# Altium PCB Final_PCB.PcbDoc
Units mm, origin at the board's own origin, x right, y up, seen from the top; angles counter-clockwise.
Board outline 97 x 100 mm, 2 copper layers (Top Layer, Bottom Layer); 57 components, 39 nets, 188 pads, 18 vias.
Unrouted connection lines stored in the file: 6.
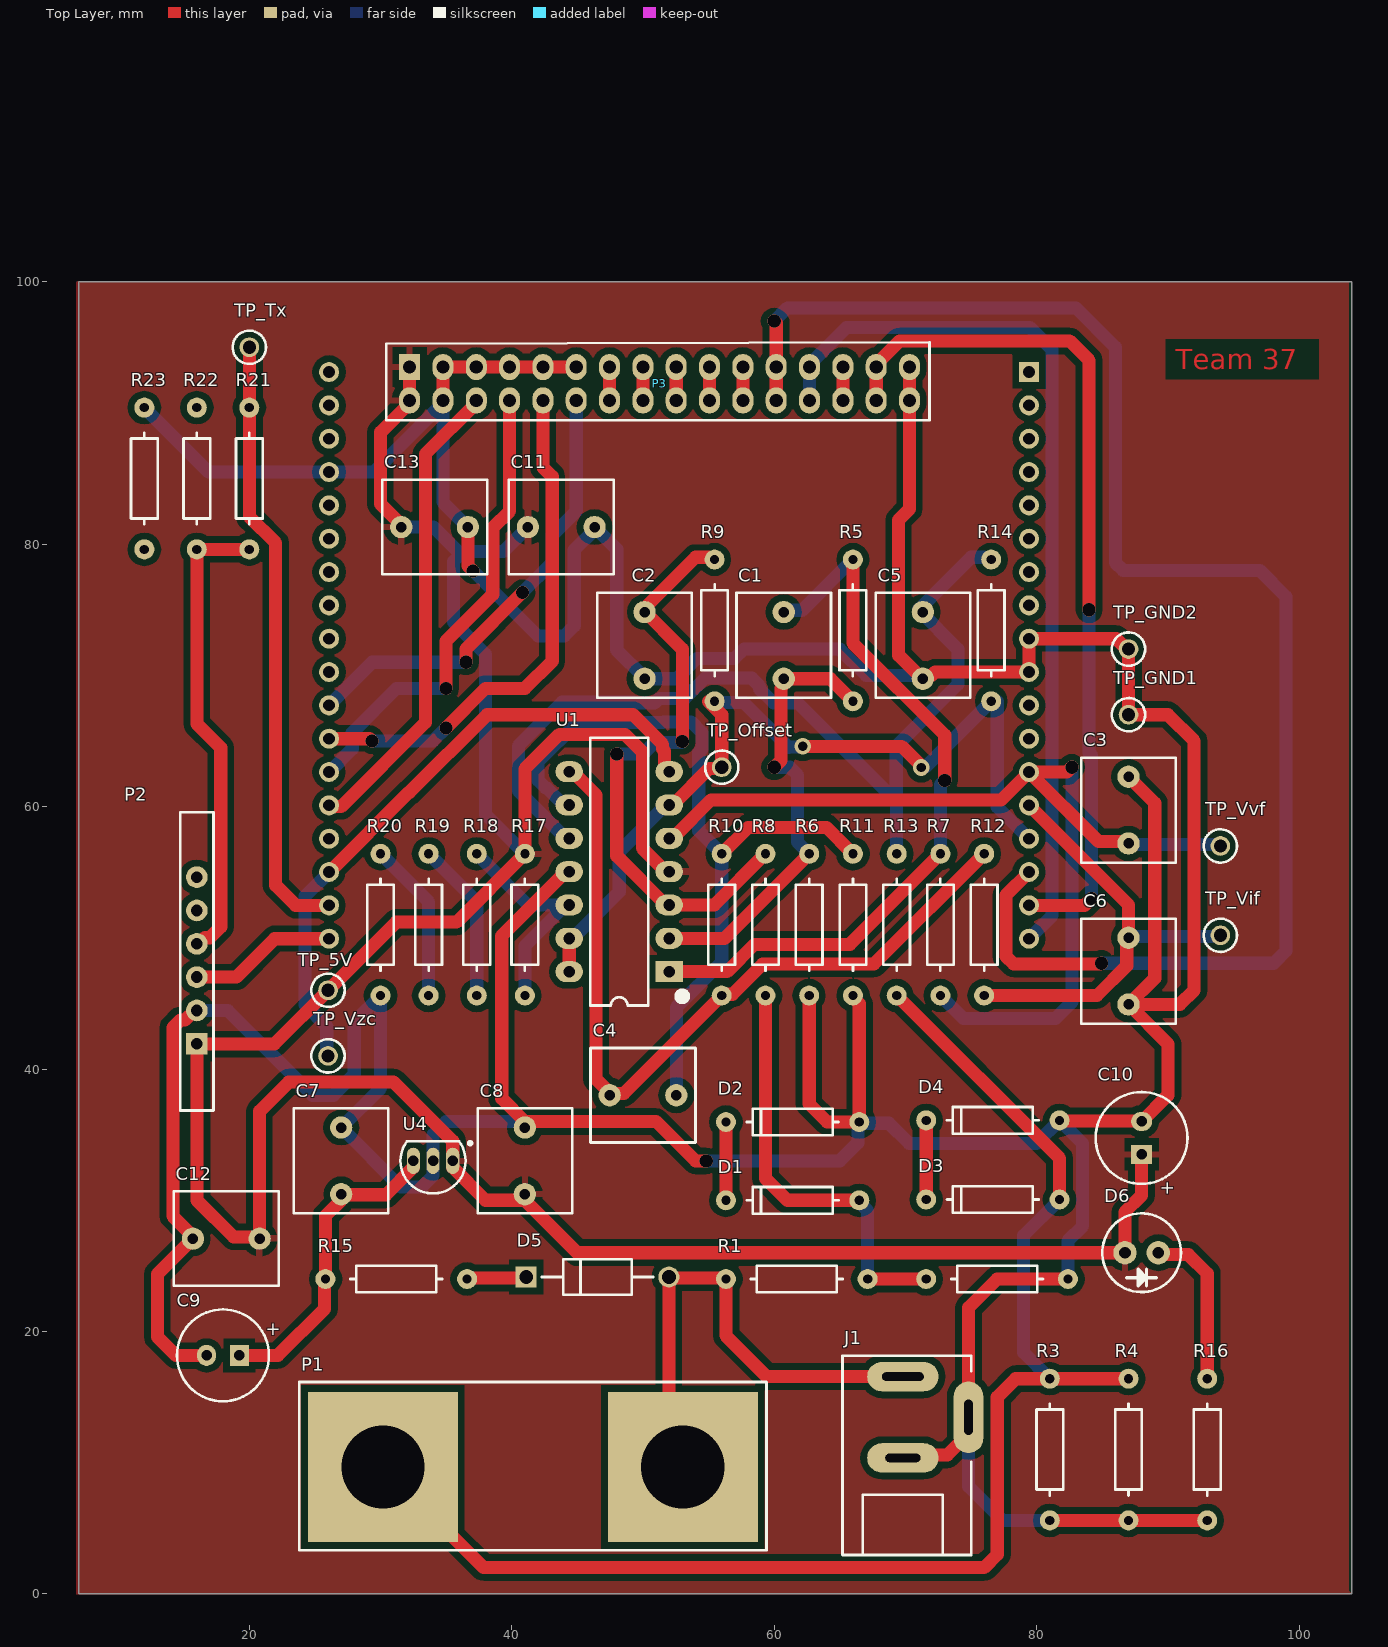
[diagram p0: Top Layer view]
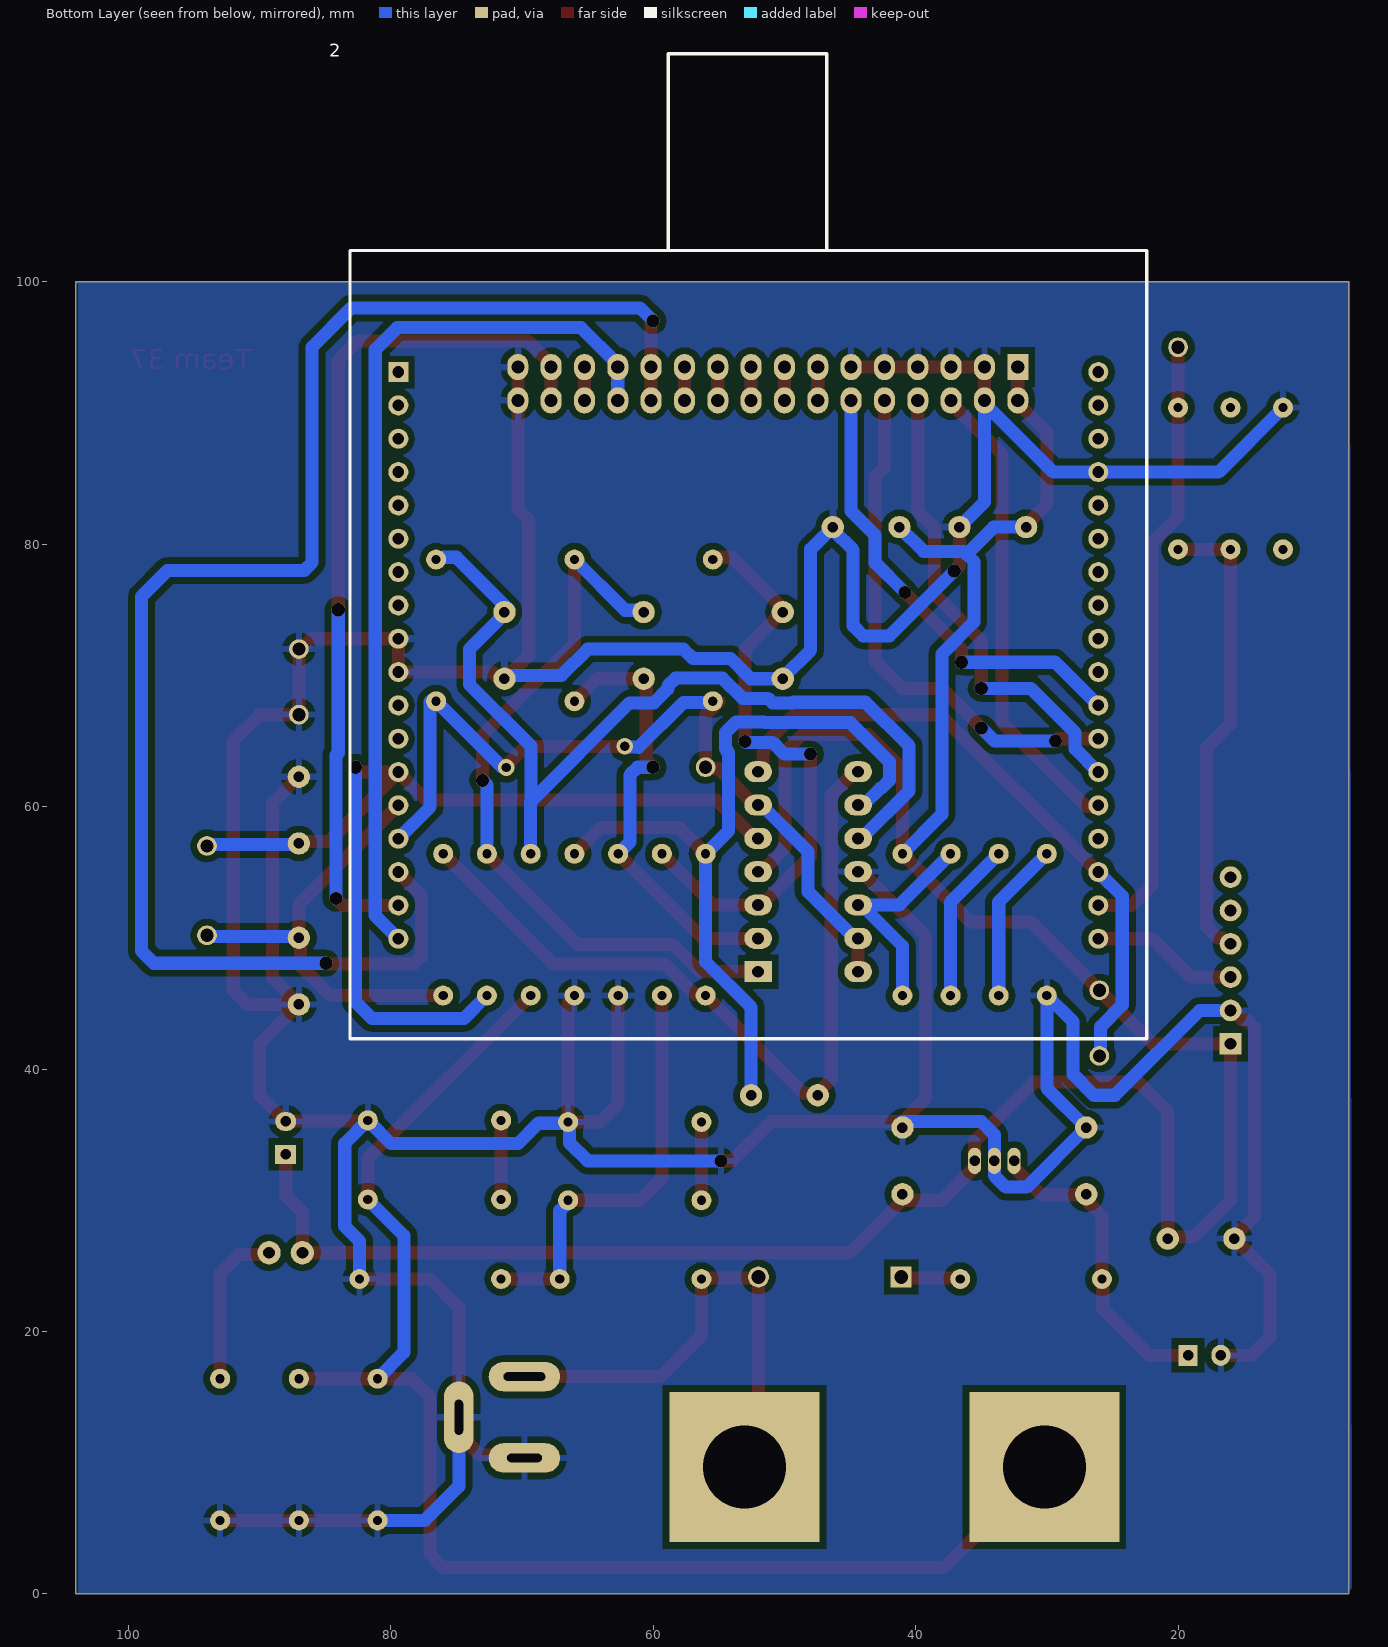
[diagram p1: Bottom Layer view, seen from below]

## Layer stack, top to bottom
Top Solder: solder mask 0.0102, Solder Resist, Dk 3.5
Top Layer: signal copper 0.0356
Dielectric 1: dielectric 0.32, FR-4, Dk 4.8
Bottom Layer: signal copper 0.0356
Bottom Solder: solder mask 0.0102, Solder Resist, Dk 3.5

## Board outline
7,0 104,0 104,100 7,100

## Design rules (kind name [scope] priority, off if disabled: settings)
Clearance [All] p1: gap=0.5 ignorepadtopadclearanceinfootprint=FALSE
Height [All] p1: minheight=0 maxheight=100 prefheight=12.7
HoleSize [All] p1: absolutevalues=TRUE maxlimit=10 minlimit=0.5 maxpercent=80.000 minpercent=20.000
PolygonConnect [All] p1: connectstyle=Relief reliefconductorwidth=0.5 reliefentries=4 polygonreliefangle="90 Angle" airgapwidth=0.5
RoomDefinition Final_Schematic [InComponentClass('Final_Schematic')] p1: confinementstyle=ConfineIn formatcopy=TRUE lockcomponents=FALSE outline -35,-25 15.8,-25 15.8,0.4 -35,0.4
RoutingVias [All] p1: holewidth=0.711 width=1.27 viastyle="Through Hole" minholewidth=0.711 minwidth=1.27 maxholewidth=0.711 maxwidth=1.27
SilkToSilkClearance [All] p1: silktosilkclearance=0.1
SilkToSolderMaskClearance [IsPad] p1: minsilkscreentomaskgap=0.1 clearancetoexposedcopper=TRUE
SolderMaskExpansion [All] p1: expansion=0.102 istentingtop=FALSE
Width [All] p1: maxlimit=10 minlimit=0.5 preferedwidth=1
26 further rules are at their usual default settings.

## Classes and differential pairs
component class Final_Schematic: C1 C2 C3 C4 C5 C6 C7 C8 C9 C10 C11 C12 C13 D1 D2 D3 D4 D5 D6 J1 P1 P2 P3 R1 R3 R4 R5 R6 R7 R8 R9 R10 R11 R12 R13 R14 R15 R16 R17 R18 R19 R20 R21 R22 R23 TP_5V TP_GND1 TP_GND2 TP_Offset TP_Tx TP_Vif TP_Vvf TP_Vzc U4

## Components (designator, comment, footprint, x,y, rotation, side; value= is the part's Value field where it differs from the comment)
2 "ATmega328PB Xplained Mini Header" "ATmeg328P Xplained" 52.748,71.52 r180 bottom (schematic designator U6)
C1 "100n0" "FILM CAP-0.2" 60.725,72.282 r270 top
C2 "100n0" "FILM CAP-0.2" 50.121,72.282 r270 top
C3 "3n3" "FILM CAP-0.2" 87,59.73 r90 top
C4 "100n0" "FILM CAP-0.2" 50,38 r0 top
C5 "100n0" "FILM CAP-0.2" 71.33,72.282 r270 top
C6 "3n3" "FILM CAP-0.2" 87,47.46 r270 top
C7 "100n0" "FILM CAP-0.2" 27,33 r90 top
C8 "100n0" "FILM CAP-0.2" 41,33 r90 top
C9 "47n0" "CAP-RAD-2.5mm Pitch" 17.99,18.18 r180 top
C10 "22n0" "CAP-RAD-2.5mm Pitch" 88,34.75 r90 top
C11 "100n0" "FILM CAP-0.2" 43.771,81.299 r0 top
C12 "100n0" "FILM CAP-0.2" 18.244,27.07 r180 top
C13 "100n0" "FILM CAP-0.2" 34.119,81.299 r0 top
D1 "BZX79-CXVX" AXIAL-Zener-0.4 61.402,29.992 r180 top
D2 "BZX79-CXVX" AXIAL-Zener-0.4 61.402,35.96 r180 top
D3 "BZX79-CXVX" AXIAL-Zener-0.4 76.664,30.056 r180 top
D4 "BZX79-CXVX" AXIAL-Zener-0.4 76.664,36.087 r180 top
D5 "1N4007" 1N4007-MFG 46.534,24.149 r0 top
D6 "Green" LED 88,26 r0 top
J1 "DC barrel jack" AC-Socket 69.806,10.56 r90 top value=socket
P1 "Dual Banana Plugs" "Dual Banana Plug" 41.612,9.671 r180 top
P2 "BLE Module Header" HM10_HDR1X6 16,41.92 r90 top
P3 "Display" Display 49.994,92.221 r180 top
R1 "82k" AXIAL-0.4 61.722,23.997 r180 top value=820k
R2 "3k9" AXIAL-0.4 76.984,23.997 r180 top value=39k
R3 "1R" AXIAL-0.4 81,11 r90 top
R4 "1R2" AXIAL-0.4 87,11 r90 top
R5 "22k0" AXIAL-0.4 65.996,73.425 r270 top value=56k0
R6 "22k0" AXIAL-0.4 62.667,51 r90 top value=56k0
R7 "4k7" AXIAL-0.4 72.667,51 r90 top
R8 "18k0" AXIAL-0.4 59.333,51 r90 top
R9 "22k0" AXIAL-0.4 55.455,73.425 r90 top value=56k0
R10 "8k2" AXIAL-0.4 56,51 r90 top
R11 "3k9" AXIAL-0.4 66,51 r90 top
R12 "4k7" AXIAL-0.4 76,51 r90 top
R13 "3k9" AXIAL-0.4 69.333,51 r90 top
R14 "8k2" AXIAL-0.4 76.537,73.425 r90 top
R15 "33" AXIAL-0.4 31.198,23.997 r180 top
R16 "270" AXIAL-0.4 93,11 r90 top
R17 "39k0" AXIAL-0.4 41,51 r90 top
R18 "27k0" AXIAL-0.4 37.333,51 r90 top
R19 "1k2" AXIAL-0.4 33.667,51 r90 top
R20 "39R0" AXIAL-0.4 30,51 r90 top
R21 "4k7" AXIAL-0.4 20,85 r270 top
R22 "820R0" AXIAL-0.4 16,85 r270 top
R23 "10k0" AXIAL-0.4 12,85 r270 top
TP_5V "5003" TP_TH 26,46 r90 top
TP_GND1 "5003" TP_TH 87,67 r90 top
TP_GND2 "5003" TP_TH 87,72 r90 top
TP_Offset "5003" TP_TH 56,63 r90 top
TP_Tx "5003" TP_TH 20,95 r90 top
TP_Vif "5003" TP_TH 94,50.19 r90 top
TP_Vvf "5003" TP_TH 94,57 r90 top
TP_Vzc "5003" TP_TH 26,41 r90 top
U1 "LM324" DIP-14 48.19,55.036 r180 top
U4 "L78L05ACZ" TO-92 34,33 r90 top

## Footprints (in the part's own frame and the unit in brackets; to place one, negate y for a bottom-side part, rotate by r counter-clockwise, add the part's x,y. Pads: shape width x height; smd on the part's side, far side on the other; paste and mask are expansions set on the pad)
1N4007-MFG [mm]
  round 1.6 hole 1.05 paste-1000 mask+0: 1(5.438,0)
  rect 1.6x1.6 hole 1.05 paste-1000 mask+0: 2(-5.438,0)
  silkscreen extent -4.24,-1.35 4.24,1.35, body extent -6.34,-1.45 6.34,1.45, height 0.25
AC-Socket [mm]
  oval 2.25x5.45 hole 0.635 slot 3.175 at 90 deg: 1(6,0)
  oval 5.45x2.25 hole 0.635 slot 2.667 at 0 deg: 2(2.9,-5)
  oval 2.25x5.45 hole 0.635 slot 2.667 at 90 deg: 3(-0.2,0)
  silkscreen extent -7.6,-5.2 7.6,4.6, body extent -6.7,-5 6,4.2, height 10.5
"ATmeg328P Xplained" [mil]
  rect 60x60 hole 35: 1(-1050,850)
  round 60 hole 35: 2(-1050,750) 3(-1050,650) 4(-1050,550) 5(-1050,450) 6(-1050,350) 7(-1050,250) 8(-1050,150) 9(-1050,50) 10(-1050,-50) 11(-1050,-150) 12(-1050,-250) 13(-1050,-350) 14(-1050,-450) 15(-1050,-550) 16(-1050,-650) 17(-1050,-750) 18(-1050,-850) 19(1050,-850) 20(1050,-750) 21(1050,-650) 22(1050,-550) 23(1050,-450) 24(1050,-350) 25(1050,-250) 26(1050,-150) 27(1050,-50) 28(1050,50) 29(1050,150) 30(1050,250) 31(1050,350) 32(1050,450) 33(1050,550) 34(1050,650) 35(1050,750) 36(1050,850)
  silkscreen extent -1195,-1150 1195,1805, body extent -1201,-1150 1161,1845, height 452
AXIAL-0.4 [mm]
  round 1.524 hole 0.7: 1(-5.4,0) 2(5.4,0)
  silkscreen extent -3.5,-1.02 3.5,1.02, body extent -5.7,-1.3 5.7,1.3, height 2.7
AXIAL-Zener-0.4 [mil]
  round 60 hole 27.56: 1(-200,0) 2(200,0)
  silkscreen extent -138,-40 138,40, body extent -211,-52 211,52, height 92
"CAP-RAD-2.5mm Pitch" [mm] "Cap 6.3 X 11.2"
  rect 1.45x1.6 hole 0.8: 1(-1.25,0)
  oval 1.45x1.6 hole 0.8: 2(1.25,0)
  silkscreen extent -3.5,-3.5 3.5,3.5, body extent -3.15,-3.15 3.15,3.15, height 11.5
DIP-14 [mm] "DIP; 14 Leads; Row Spacing 7.62 mm; Pitch 2.54 mm"
  rect 2.1x1.6 hole 0.9: 1(-3.81,7.62)
  oval 2.1x1.6 hole 0.9: 2(-3.81,5.08) 3(-3.81,2.54) 4(-3.81,0) 5(-3.81,-2.54) 6(-3.81,-5.08) 7(-3.81,-7.62) 8(3.81,-7.62) 9(3.81,-5.08) 10(3.81,-2.54) 11(3.81,0) 12(3.81,2.54) 13(3.81,5.08) 14(3.81,7.62)
  silkscreen extent -5.1,-10.2 2.2,10.2, body extent -5.07,-10.2 5.09,10.12, height 9.47
Display [mm]
  rect 1.6x2 hole 1: 1(17.78,-1.27)
  oval 1.6x2 hole 1: 2(17.78,1.27) 3(15.24,-1.27) 4(15.24,1.27) 5(12.7,-1.27) 6(12.7,1.27) 7(10.16,-1.27) 8(10.16,1.27) 9(7.62,-1.27) 10(7.62,1.27) 11(5.08,-1.27) 12(5.08,1.27) 13(2.54,-1.27) 14(2.54,1.27) 15(0,-1.27) 16(0,1.27) 17(-2.54,-1.27) 18(-2.54,1.27) 19(-5.08,-1.27) 20(-5.08,1.27) 21(-7.62,-1.27) 22(-7.62,1.27) 23(-10.16,-1.27) 24(-10.16,1.27) 25(-12.7,-1.27) 26(-12.7,1.27) 27(-15.24,-1.27) 28(-15.24,1.27) 29(-17.78,-1.27) 30(-17.78,1.27) 31(-20.32,-1.27) 32(-20.32,1.27)
  silkscreen extent -21.84,-3.18 19.56,2.79, body extent -32.6,-50 26.4,4, height 13
"Dual Banana Plug" [mm] "Connector; 2 Position"
  rect 11.43x11.43 hole 6.35: 1(-11.43,0) 2(11.43,0)
  silkscreen extent -17.8,-6.48 17.8,6.35, body extent -17.38,-5.99 17.43,5.99, height 5.5
"FILM CAP-0.2" [mm]
  round 1.7 hole 0.8: 1(-2.54,0) 2(2.54,0)
  silkscreen extent -4,-3.6 4,3.6, body extent -3.6,-3.6 3.6,3.6, height 13.2
HM10_HDR1X6 [mil] "Connector; Header; 6 Position"
  rect 65x65 hole 35.43: 1(0,0)
  round 65 hole 35.43: 2(100,0) 3(200,0) 4(300,0) 5(400,0) 6(500,0)
  silkscreen extent -200,-50 695,50, body extent -142,-39 571,228, height 1843
LED [mil]
  round 70 hole 35.43: 1(-50,0) 2(50,0)
  silkscreen extent -118,-118 118,118, body extent -98,-98 98,98, height 413
TO-92 [mm] "TO, Flat Index; 3 In-Line, Axial Leads; Body Dia. 4.5mm; Leads 0.51 x 0.48 mm (max)"
  oval 2x1 hole 0.8: 1(0,-1.5) 2(0,0) 3(0,1.5)
  silkscreen extent -2.48,-2.96 1.5,2.48, body extent -2.4,-2.4 1.53,2.4, height 6.73
TP_TH [mm] "Test Point, Through Hole, Dia 2.54mm"
  round 1.5 hole 1: 1(0,0)
  silkscreen extent -1.27,-1.27 1.27,1.27, body extent -1.27,-1.27 1.27,1.27, height 4.57

## Part data
2: library part ATmega328PBXplained_TH, "Dual 18-pin headers connecting to ATmega328PB Xplained Mini", Manufacturer="Microchip Technology", Manufacturer Part Number=ATMEGA328PB-XMINI, Operating System=-, Supplier Part Number 1=ATMEGA328PB-XMINI-ND, Board Type="Evaluation Platform", Category="Development Boards, Kits, Programmers", ComponentLink1Description=http://www.microchip.com/mymicrochip/filehandler.aspx?ddocname=en589665, ComponentLink1URL=http://www.microchip.com/mymicrochip/filehandler.aspx?ddocname=en589665, Contents=Board(s), Core Processor=AVR, For Use With/Related Products=ATmega328P, Mounting Type=Fixed, Part Status=Active, Platform="ATmega328P Xplained Mini", Pricing 1="1=15.11 (NZD)", RoHS="RoHS Compliant", Stock 1=454, Supplier 1=Digi-Key, Type="MCU 8-Bit"
C1 C2 C3 C4 C5 C6 C7 C8 C11 C12 C13: library part FilmCap_TH_5P08, "Throughhole film capacitor with 5.08mm pitch"
C9 C10: library part ElecCap_TH_2P0, "Electrolytic capacitor with radial package, 2mm pitch and 5.2mm diameter", LatestRevisionDate=17-Jul-2002, LatestRevisionNote="Re-released for DXP Platform.", PackageDescription="Polarized Capacitor; 2 Leads", PackageReference=POLAR0.8, Published=8-Jun-2000, Publisher="Altium Limited"
D1 D2 D3 D4: library part Zener_TH_4AX0, "Axial zener diode BZX79 series", Manufacturer="Nexperia USA Inc.", Manufacturer Part Number=BZX79-C4V7,143, Operating Temperature="-65°C ~ 200°C", Package / Case="DO-204AH, DO-35, Axial", Supplier Device Package=DO-35, Supplier Part Number 1=1727-1864-1-ND, Tolerance=±5%, Category="Discrete Semiconductor Products", ComponentLink1Description=https://assets.nexperia.com/documents/data-sheet/BZX79.pdf, ComponentLink1URL=https://assets.nexperia.com/documents/data-sheet/BZX79.pdf, Mounting Type="Through Hole", Packaging="Cut Tape (CT)", Part Status=Active, Pricing 1="1=0.23, 10=0.206, 100=0.1123, 500=0.06912, 1000=0.04714 (NZD)", RoHS="RoHS Compliant", Stock 1=8933, Supplier 1=Digi-Key
D5: library part 1N4007_TH_4AX0, "1N4007 1000V standard axial diode", Supplier Part Number 1=1N4007RLGOSCT-ND, ComponentLink1Description=https://www.fairchildsemi.com/datasheets/1N/1N914.pdf, ComponentLink1URL=https://www.fairchildsemi.com/datasheets/1N/1N914.pdf, Supplier 1=Digi-Key
D6: library part LED_TH_2P54, "Typical throughole GaAs LED with 2.54mm pitch", Manufacturer="Generic Components", Class I=Optoelectronic, Class II=LED, Published=8-Jun-2000, Publisher="Altium Limited", Revision="July-2002: Re-released for DXP Platform."
J1: library part AC_Input, "DC barrel jack connection to AC source"
P1: library part AC_Output, "Dual banana plugs connection to the AC load", LatestRevisionDate=17-Jul-2002, LatestRevisionNote="Re-released for DXP Platform.", Publisher="Altium Limited"
P2: library part BLEModule_TH, "2.54mm pitch 6-pin header for BLE module", LatestRevisionDate=17-Jul-2002, LatestRevisionNote="Re-released for DXP Platform.", Publisher="Altium Limited"
P3: "16-Pin Header Connecting Display"
R1 R2 R3 R4 R5 R6 R7 R8 R9 R10 R11 R12 R13 R14 R15 R16 R17 R18 R19 R20 R21 R22 R23: library part Res_TH_0AX4, "Through hole resistor", ComponentLink1Description=http://www.royalohm.com/pdf/product2017/PrecisionMetalMF.pdf, LatestRevisionDate=17-Jul-2002, LatestRevisionNote="Re-released for DXP Platform.", PackageReference=AXIAL-0.4, Published=8-Jun-2000, Publisher="Altium Limited"
TP_5V TP_GND1 TP_GND2 TP_Offset TP_Tx TP_Vif TP_Vvf TP_Vzc: library part TestPoint, "Test Point, Orange, 1-Pin THD, RoHS", Forward Current="3 A", Forward Voltage="1.08 V", Max Operating Temperature="150 degC", Max Surge Current="80 A", Min Operating Temperature="-65 degC", Package Quantity=500, Peak Reverse Current="600 uA", ComponentLink1Description="Manufacturer URL", ComponentLink1URL=http://www.keyelco.com/, ComponentLink2Description=Datasheet, ComponentLink2URL=http://keyelco.com/userAssets/file/M65p56.pdf, DatasheetVersion=Jun-15, Diameter="5.3 mm", Height="0.25 inch", Length="9.5 mm", Mount="Through Hole", PackageDescription="1-Pin Through Hole Device, Dia 2.54 mm", PackageReference=5003, Packaging=Bulk, Pins=2, Radiation Hardening=No, REACH SVHC="No SVHC", RoHSCompliant=true, Weight="0.01 lb", Width="0.25 inch"
U1: library part LM324N_TH_DIP16, "IC OPAMP GP 14DIP", Current - Supply=1mA, Manufacturer="ON Semiconductor", Manufacturer Part Number=LM324N, Operating Temperature="0°C ~ 70°C", Package / Case="14-DIP (0.300\", 7.62mm)", Supplier Device Package=14-DIP, Supplier Part Number 1=LM324NFS-ND, Voltage - Supply, Single/Dual (±)="3 V ~ 32 V, ±1.5 V ~ 16 V", Amplifier Type="General Purpose", Base Part Number=LM324, Category="Integrated Circuits (ICs)", ComponentLink1Description=https://www.fairchildsemi.com/datasheets/LM/LM2902.pdf, ComponentLink1URL=https://www.fairchildsemi.com/datasheets/LM/LM2902.pdf, Mounting Type="Through Hole", Output Type=-, Packaging=Tube, Part Status=Active, Pricing 1="1=0.9, 10=0.775, 100=0.5789, 500=0.45482, 1000=0.35145 (NZD)", RoHS="RoHS Compliant", Slew Rate=-, Stock 1=2900, Supplier 1=Digi-Key
U4: library part L78L05_TH_TO92, "Voltage Regulator 5V", Base Part Number=LM78L05, Current - Output=100mA, Manufacturer="ON Semiconductor", Manufacturer Part Number=LM78L05ACZX, Operating Temperature="-40°C ~ 125°C", Package / Case="TO-226-3, TO-92-3 (TO-226AA) (Formed Leads)", Supplier Device Package=TO-92-3, Supplier Part Number 1=LM78L05ACZXCT-ND, Voltage - Input (Max)=30V, Voltage - Output (Max)=-, Voltage - Output (Min/Fixed)=5V, Category="Integrated Circuits (ICs)", ComponentLink1Description=https://www.fairchildsemi.com/datasheets/MC/MC78L05A.pdf, ComponentLink1URL=https://www.fairchildsemi.com/datasheets/MC/MC78L05A.pdf, Control Features=-, Mounting Type="Through Hole", Output Configuration=Positive, Output Type=Fixed, Packaging="Cut Tape (CT)", Part Status=Active, Pricing 1="1=0.69, 10=0.517, 100=0.3226, 500=0.2207, 1000=0.16976 (NZD)", Protection Features="Over Temperature, Short Circuit", PSRR="80dB (120Hz)", RoHS="RoHS Compliant", Stock 1=7782, Supplier 1=Digi-Key, Voltage Dropout (Max)=-

## Via types
v1: diameter 1, hole 1, Top Layer to Bottom Layer, 16 vias
v2: diameter 1.27, hole 0.711, Top Layer to Bottom Layer, 2 vias

## Nets (pads, with @x,y where several pads share a name; then routed paths per layer and width w, separated by ;. In a path a pad name is that pad's centre, name@x,y a point inside that pad or via, vN(x,y) a via of type N, cw(c..) or ccw(c..) an arc to the next point about the centre after c; other vN are vias at no path point)
5V: C8.1 C10.1 C11.1 C12.1 C13.1 D6.1 P2.1 P3.1 P3.2 P3.31 P3.32 R17.2 TP_5V.1 U1.4 U4.1 | length 217.7
  Top Layer w1: C13.1 31.579,81.464 30,83.043 30,88.537 32.214,90.751 P3.2 P3.1 ; U1.4 51.807,55.23 51.551,55.23 49.95,56.831 49.95,64.171 48.621,65.5 43.629,65.5 41,62.871 R17.2 35.798,51.198 31.198,51.198 TP_5V.1 21.92,41.92 P2.1 16,30 18.796,27.204 20.65,27.204 C12.1 20.784,36.784 23,39 31,39 35.5,34.5 U4.1 35.5,32.5 38,30 41,30 45,26 D6.1 86.73,29.108 88,30.378 C10.1
  Bottom Layer w1: C13.1 34.043,81.299 36.11,79.232 ; R17.2 38,59.4 38,71.621 35.551,74.07 35.551,78.672 36.328,79.449 39.381,79.449 C11.1
DS1: 2.23 P3.5 P3.6 | length 36.2
  Top Layer w1: 2.23 26.168,60 27,60 33.429,66.429 33.429,86.88 37.294,90.745 P3.6
DS2: 2.24 P3.7 P3.8 | length 36.2
  Top Layer w1: v1(35,69) 35,72.621 38.551,76.172 38.551,81.235 39.834,82.518 P3.8
  Bottom Layer w1: 2.24 27.84,64.392 27.84,65.621 31.218,69 v1(35,69)
DS3: 2.25 P3.9 P3.10 | length 39.8
  Top Layer w1: 2.25 29.17,65.17 v1(29.34,65) ; v1(35,66) 38,69 41,69 43.081,71.081 43.081,85.15 42.374,85.857 P3.10
  Bottom Layer w1: v1(29.34,65) 34,65 v1(35,66)
DS4: 2.26 P3.11 P3.12 | length 35.2
  Top Layer w1: v1(36.5,71) 36.5,72 v1(40.811,76.311)
  Bottom Layer w1: 2.26 29.368,71 v1(36.5,71) ; v1(40.811,76.311) 43.081,78.581 43.081,80.685 44.914,82.518 P3.12
GND: 2.9 2.10 2.33 C2.2 C3.2 C5.2 C6.2 C7.2 C8.2 C9.2 C10.2 C11.2 C12.2 C13.2 D2.1 D4.1 J1.2 J1.3 P2.2 P3.3 P3.4 R2.1 R3.1 R4.1 R6.1 R11.1 R16.1 R20.1 R23.1 TP_GND1.1 TP_GND2.1 U1.11 U4.2 | length 458.9
  Top Layer w1: P2.2 15.824,44.46 15.109,43.746 14.76,43.746 14.175,43.16 14.175,28.789 15.704,27.259 C12.2 13,24.366 13,19.586 14.406,18.18 C9.2 ; P3.4 P3.3 37.294,93.491 39.834,93.491 42.374,93.491 44.914,93.491 ; C13.2 36.659,78.341 v1(37.051,77.949) ; U1.11 44.124,55.036 39.238,50.15 39.238,37.762 41,36 51,36 54,33 v1(54.822,33) ; R6.1 62.667,37.333 64.04,35.96 D2.1 66.482,44.976 66,45.458 R11.1 ; J1.3 70.045,10.599 73.207,10.599 74.806,12.198 J1.2 74.806,21.806 77,24 82.381,24 R2.1 ; 70.314,93.491 70.314,90.951 70.314,82.682 69.48,81.848 69.48,71.52 C5.2@71,70 ; C5.2@72,70 72.25,70.25 2.10 2.9 86.075,72.79 86.865,72 TP_GND2.1 TP_GND1.1 90,67 92,65 92,46 90.92,44.92 C6.2 ; R3.1 R4.1 R16.1 ; D4.1 81.787,36.043 87.956,36.043 C10.2 90,38 90,41.92 C6.2 ; C3.2 89,60.27 89,46.92 C6.2
  Bottom Layer w1: R23.1 16.91,85.49 2.33 29.499,85.49 P3.4@34.754,90.745 ; P2.2 18.358,44.46 24.818,38 26.414,38 28,39.586 28,43.6 R20.1 30,38.54 C7.2 31.54,31 33.121,31 34,31.879 U4.2 34,35 35,36 C8.2@41,36 ; P3.4 P3.4@34.754,90.745 ; C13.2 34.754,83.204 P3.4@34.754,90.745 ; v1(37.051,77.949) 42,73 44,73 44.763,73.763 44.763,79.561 46.311,81.11 C11.2 48,79.61 48,71.925 50.121,69.804 C2.2 52.559,69.742 54.104,71.287 56.977,71.287 57.69,72 65,72 67,70 C5.2@71,70 ; U1.11 U1.11@44.636,55.036 ; v1(54.822,33) 65,33 66.382,34.382 66.382,35.86 D2.1 66.575,35.867 68.744,35.867 70.286,34.325 79.982,34.325 D4.1 83.506,34.325 83.506,28.023 82.384,26.901 R2.1 ; J1.2 74.806,8.194 77.4,5.6 R3.1
I_filtered: 2.14 C6.1 R12.1 TP_Vif.1 | length 34.3
  Top Layer w1: R12.1 84.6,45.6 86.866,47.866 86.866,49.866 C6.1 87,52.508 2.14
  Bottom Layer w1: C6.1 87.095,50.095 93.905,50.095 TP_Vif.1
Isensp: D3.1 P1.2 R3.2 R4.2 R13.1 | length 109.3
  Top Layer w1: P1.2 37.853,2 76,2 77,3 77,15 78.4,16.4 R3.2 R4.2 ; R13.1 81.744,33.189 D3.1
  Bottom Layer w1: R3.2 79,18.4 79,27.312 D3.1
LED1: P3.13 P3.14 | length 2.5
  Top Layer w1: P3.14 P3.13
LED2: P3.15 P3.16 | length 2.5
  Top Layer w1: P3.16 P3.15
LED3: P3.17 P3.18 | length 2.5
  Top Layer w1: P3.18 P3.17
LED4: P3.19 P3.20 | length 2.5
  Top Layer w1: P3.20 P3.19
NetC1_1: C1.1 R5.1 R7.2 U1.1 | length 56.8
  Top Layer w1: U1.1 56.416,47.416 58.5,49.5 65.767,49.5 R7.2 ; R5.1 65.996,72.46 73,65.456 v1(73,62)
  Bottom Layer w1: C1.1 60.859,74.956 62.127,74.956 R5.1 ; R7.2 72.667,61.667 v1(73,62)
NetC1_2: C1.2 R5.2 R6.2 U1.2 | length 34.8
  Top Layer w1: U1.2 56.223,49.956 R6.2 ; v1(60,63) 60.525,63.525 60.525,69.047 60.592,69.113 60.592,69.608 C1.2 64.279,69.742 R5.2
  Bottom Layer w1: v1(60,63) 61.189,63 61.775,62.414 61.775,57.292 R6.2
NetC2_1: C2.1 R8.2 R9.2 U1.3 | length 45.6
  Top Layer w1: v1(48,64) 48,56.241 51.744,52.496 U1.3 55.43,52.496 R8.2 ; v1(52.995,64.95) 52.995,64.995 53,65 53,72 50,75 54,79 R9.2@55,79
  Bottom Layer w1: v1(48,64) 50,64 50.892,64.892 52.937,64.892 v1(52.995,64.95)
NetC4_1: C4.1 R10.1 R12.2 U1.8 | length 62.2
  Top Layer w1: U1.8 44.573,62.463 44.829,62.463 46.43,60.862 46.43,39.219 47.46,38.189 C4.1 47.594,38.134 48.534,38.134 R10.1 56.1,45.7 56.822,45.7 59.121,48 67.6,48 R12.2
NetC4_2: C4.2 R10.2 R11.2 U1.9 | length 60.2
  Top Layer w1: R10.2 58,58.4 58,58.414 63.986,58.414 R11.2
  Bottom Layer w1: U1.9 43.968,60.116 42.67,61.414 42.586,61.414 42,62 42,63.414 44.978,66.392 51.509,66.392 51.567,66.45 53.671,66.45 54.5,65.621 54.5,64.379 54.25,64.129 54.25,58.15 R10.2 56,48.152 52.54,44.692 C4.2
NetC5_1: C5.1 R13.2 R14.2 U1.10 | length 72.3
  Bottom Layer w1: U1.10 44.187,57.77 43.931,57.77 40.5,61.201 40.5,64.621 43.829,67.95 49.297,67.95 49.355,67.892 50.887,67.892 51.237,68.242 53.18,68.242 54.725,69.787 58.29,69.787 58.876,69.201 58.876,68.976 59.959,67.892 61.808,67.892 69.333,60.367 R13.2 ; 69.3,60.4 69.3,64.6 74,69.3 74,72 71,75 75,79 R14.2@76,79
NetD1_2: D1.2 D2.2 | length 6
  Top Layer w1: D1.2 D2.2
NetD3_2: D3.2 D4.2 | length 6
  Top Layer w1: D3.2 D4.2
NetD5_2: D5.2 R15.1 | length 4.6
  Top Layer w1: R15.1 36.674,24.073 41.02,24.073 D5.2
NetD6_2: D6.2 R16.2 | length 12.4
  Top Layer w1: D6.2 89.419,25.851 91.563,25.851 93,24.414 R16.2
NetP2_4: P2.4 R21.2 R22.2 | length 35.9
  Top Layer w1: P2.4 16.176,49.54 16.636,50 17,50 17.826,50.826 17.826,64.478 16,66.304 R22.2 R21.2
NetR17_1: R17.1 R18.2 U1.12 | length 16.9
  Bottom Layer w1: R18.2 41.237,52.496 U1.12@44.124,52.496 ; R17.1 41,49.372 U1.12@44.124,52.496 ; U1.12 U1.12@44.124,52.496
NetR18_1: R18.1 R19.2 | length 12.3
  Bottom Layer w1: R19.2 37.333,52.733 R18.1
NetR19_1: R19.1 R20.2 | length 12.3
  Bottom Layer w1: R20.2 33.667,52.733 R19.1
OE: P3.27 P3.28 | length 2.5
  Top Layer w1: P3.28 P3.27
Offset: 2.15 R9.1 R14.1 TP_Offset.1 U1.6 U1.13 U1.14 | length 63.3
  Top Layer w1: U1.14 U1.13 ; U1.6 52.256,60.116 55.044,62.904 55.904,62.904 TP_Offset.1 56,67 R9.1@55,68 ; v2(62.172,64.586) 69.714,64.586 v2@71.075,63.225
  Bottom Layer w1: U1.13 44.636,49.956 48.19,53.511 48.19,56.562 51.744,60.116 U1.6 ; R9.1 55.555,67.925 57.697,67.925 61.122,64.5 61.156,64.535 62.12,64.535 v2(62.172,64.586) ; v2(71.2,62.975) 71.252,63.027 71.539,63.027 R14.1 ; R14.1@77,68 77,59.968 2.15
RX: 2.19 P2.3 | length 11.3
  Top Layer w1: P2.3 19.003,47 21.933,49.93 2.19
SH_CP: 2.16 P3.23 P3.24 | length 120.4
  Top Layer w1: v1(60,97) 60.154,96.846 P3.23 P3.24 ; 2.16 77.656,53.248 77.656,48.586 78.241,48 84.879,48 v1(84.939,48.061)
  Bottom Layer w1: v1(60,97) 61,98 83,98 86,95 86,78.586 86.586,78 97,78 99,76 99,49 98.061,48.061 v1(84.939,48.061)
SH_DS: 2.17 P3.29 P3.30 | length 66.4
  Top Layer w1: P3.30 P3.29 67.774,93.697 69.568,95.491 82.509,95.491 84,94 v1(84,75) ; 2.17 83.65,52.47 v1(84.18,53)
  Bottom Layer w1: v1(84,75) 84,64.09 84.18,63.91 v1(84.18,53)
SH_ST: 2.18 P3.25 P3.26 | length 68.7
  Bottom Layer w1: P3.26 P3.25 62.694,93.697 65.497,96.5 79.5,96.5 81.18,94.82 81.18,51.692 2.18
SRCLR: P3.21 P3.22 | length 2.5
  Top Layer w1: P3.22 P3.21
Tx: 2.20 R21.1 TP_Tx.1 | length 46.5
  Top Layer w1: TP_Tx.1 R21.1 20,82.092 22,80.092 22,54 23.53,52.47 2.20
V_filtered: 2.13 C3.1 R7.1 TP_Vvf.1 U1.5 | length 79
  Top Layer w1: U1.5 52.193,57.77 52.449,57.77 55.179,60.5 77.288,60.5 2.13 ; v1(82.68,63) 82.31,62.63 2.13 ; C3.1 86.866,57.324 84.724,57.324 2.13
  Bottom Layer w1: R7.1 74.429,43.838 81.414,43.838 82.68,45.103 v1(82.68,63) ; C3.1 87.095,57.095 93.905,57.095 TP_Vvf.1
Vin: D5.1 J1.1 P1.1 R1.2 | length 38.4
  Top Layer w1: P1.1 51.972,10.741 D5.1 52.049,24.073 56.246,24.073 R1.2 56.322,19.678 59.44,16.56 J1.1
Vrect: C7.1 C9.1 R15.2 U4.3 | length 24
  Top Layer w1: C9.1 22.18,18.18 25.735,21.735 25.735,23.933 R15.2 25.798,28.798 27,30 27,30.414 30.414,30.414 32.5,32.5 U4.3
Vsensp: D1.1 R1.1 R2.2 R8.1 | length 32.5
  Top Layer w1: R8.1 59.333,31.667 61,30 66.474,30 D1.1 ; R1.1 R2.2
  Bottom Layer w1: D1.1 66.482,29.85 67.122,29.21 R1.1
Vzc: 2.21 TP_Vzc.1 U1.7 | length 49.2
  Top Layer w1: 2.21 32.148,61.08 32.202,61.08 38.121,67 49.243,67 51.5,64.743 51.5,64.379 51.635,64.243 51.635,62.934 51.912,62.656 U1.7
  Bottom Layer w1: TP_Vzc.1 25.904,41.096 25.904,43.231 24.25,44.885 24.25,53.182 2.21
pads on no net: 2.1 2.2 2.3 2.4 2.5 2.6 2.7 2.8 2.11 2.12 2.22 2.27 2.28 2.29 2.30 2.31 2.32 2.34 2.35 2.36 P2.5 P2.6 R22.1 R23.2

## Polygon pours and split planes (outlines as drawn)
GND on Bottom Layer "GND_L02_P000" (solid, pour order 0): 6.925,100.05 103.8,100.05 103.925,99.925 103.8,99.8 103.8,0.05 7.15,0.05 6.775,0.425
5V on Top Layer "5V_L01_P001" (solid, pour order 1): 6.8,99.95 6.9,100.05 103.775,100.05 103.775,0.25 103.95,0.075 103.85,-0.025 6.8,-0.025

## Other copper
Top Layer:
  text "Team 37" at 90.604,93.329 h1.52

## Text inside footprints (layer, text, board x,y; h text height)
C9: Top Overlay "+" at 22.39,20.58 h1 r180
C10: Top Overlay "+" at 90.4,30.35 h1 r90